# Altium PCB RFID_Tag.PcbDoc
Units mm, origin at the board's own origin, x right, y up, seen from the top; angles counter-clockwise.
Board outline 31.5 x 19 mm, 2 copper layers (Top Layer, Bottom Layer); 28 components, 31 nets, 105 pads, 59 vias.
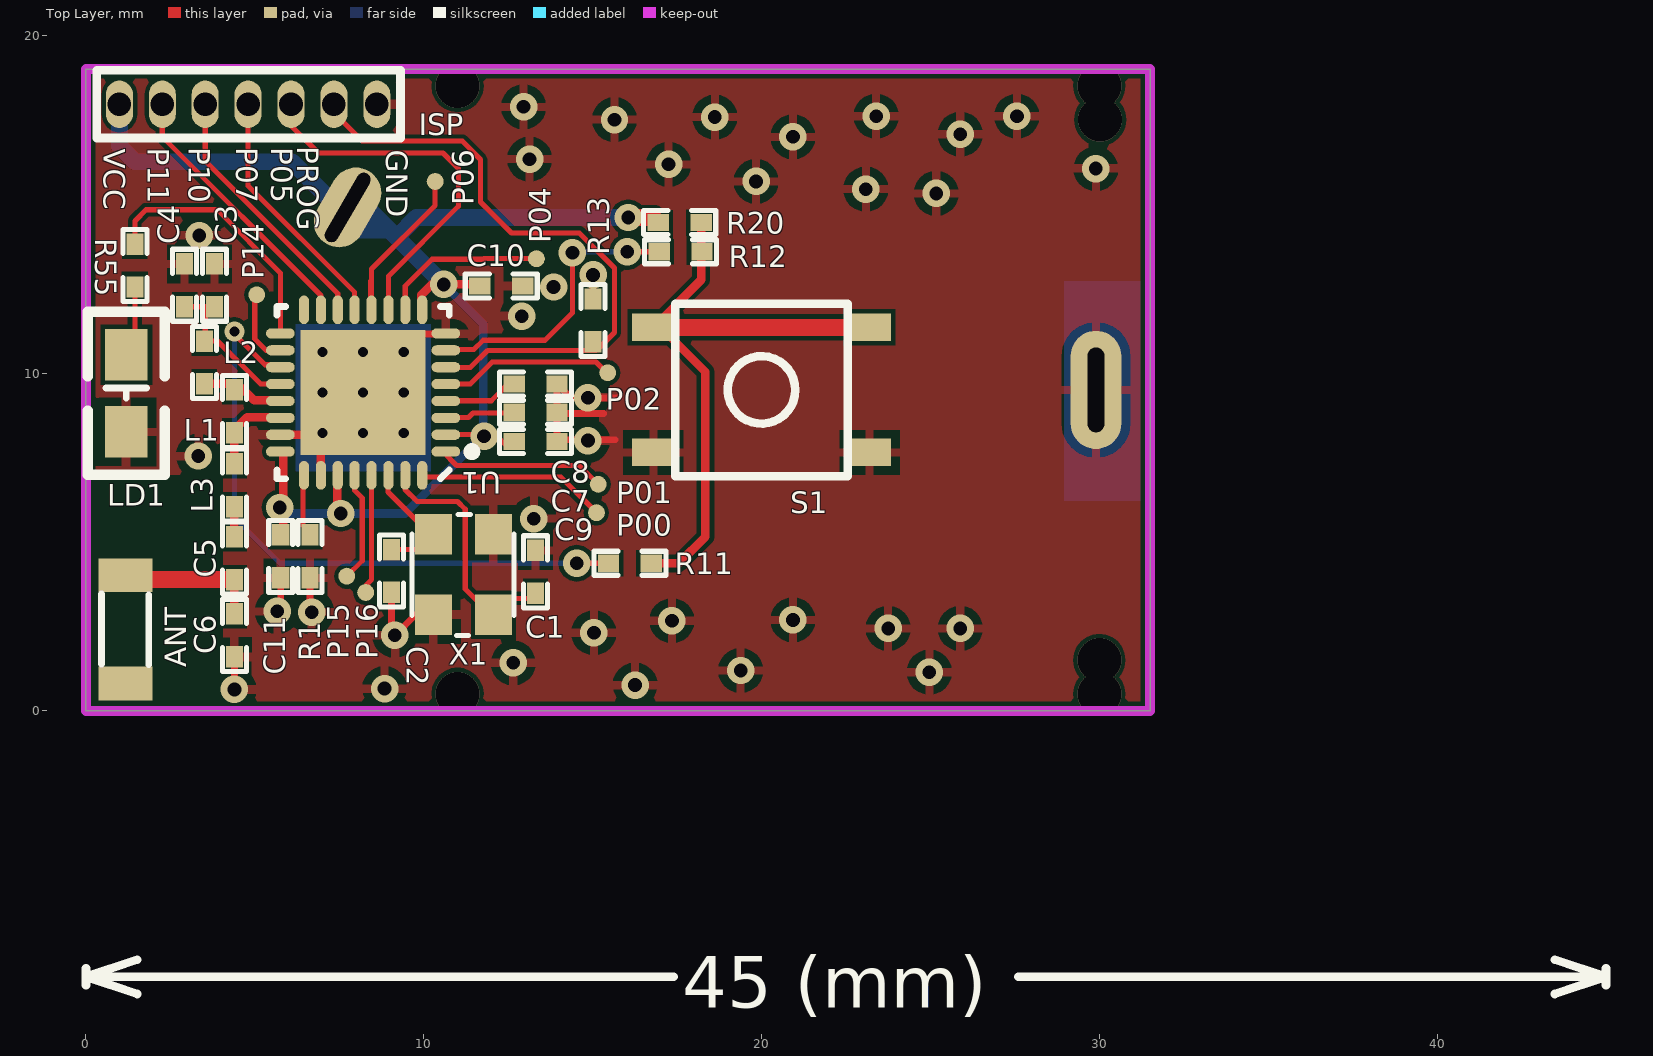
[diagram p0: Top Layer view]
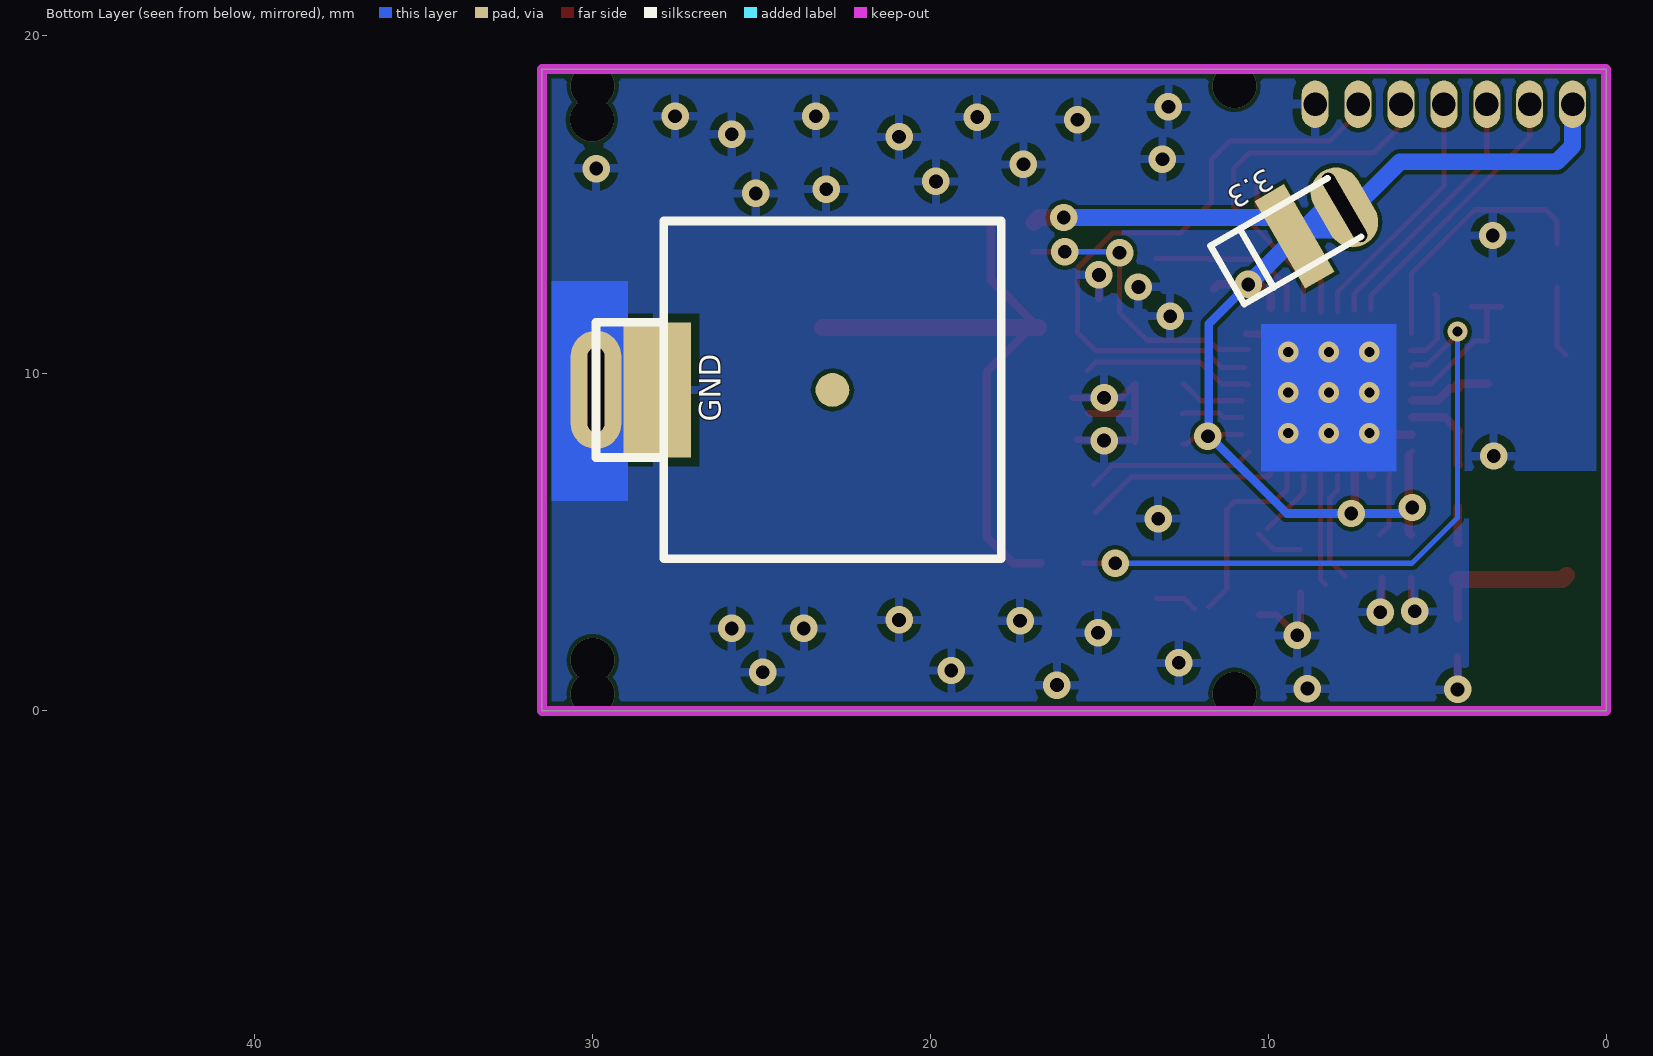
[diagram p1: Bottom Layer view, seen from below]

## Layer stack, top to bottom
Top Layer: signal copper 0.0356
Dielectric: dielectric 0.32, FR-4, Dk 4.8
Bottom Layer: signal copper 0.0356

## Board outline
0,0 0,19 31.5,19 31.5,0

## Design rules (kind name [scope] priority, off if disabled: settings)
Clearance [All] p1: gap=0.127
PolygonConnect [All] p1: connectstyle=Relief reliefconductorwidth=0.254 reliefentries=4 polygonreliefangle="90 Angle" airgapwidth=0.254
RoutingVias [All] p1: holewidth=0.711 width=1.27 viastyle="Through Hole" minholewidth=0.711 minwidth=1.27 maxholewidth=0.711 maxwidth=1.27
SolderMaskExpansion [All] p1: expansion=0.102
Width [All] p1: maxlimit=2 minlimit=0.1 preferedwidth=0.5 toplayer_prefwidth=0.3 minimp=50.000000 maximp=50.000000 favimp=50.000000
28 further rules are at their usual default settings.

## Components (designator, comment, footprint, x,y, rotation, side; value= is the part's Value field where it differs from the comment)
3.3 "Plug" CR2032电池座（正极） 7.746,14.902 r150 bottom
ANT "Antenna" 2.4G贴片天线 1.168,4.013 r270 top
C1 "NP0 50V" 0402s 13.31,4.115 r0 top
C2 "NP0 50V" 0402s 9.042,4.14 r180 top
C3 "X7R 16V" 0402s 3.81,12.598 r0 top
C4 "NP0 50V" 0402s 2.921,12.598 r0 top
C5 "NP0 +/-0.1pF, 50V" 0402s 4.394,4.521 r180 top
C6 "NP0 +/-0.1pF, 50V" 0402s 4.394,2.235 r0 top
C7 "X7R 16V" 0402s 13.31,8.839 r270 top
C8 "X7R 16V" 0402s 13.31,9.677 r270 top
C9 "X7R 16V" 0402s 13.31,7.976 r270 top
C10 "X7R 16V" 0402s 12.294,12.573 r270 top
C11 "X7R 16V" 0402s 5.766,4.572 r0 top
GND "Plug" CR2032电池座（负极） 22.9,9.5 r0 bottom locked
ISP "Header 7" SIP7-127 8.611,17.958 r90 top
L1 "Murata LQP15MN6N8B02D" 0402s 4.394,8.865 r0 top
L2 "Murata LQP15MN6N8B02D" 0402s 3.505,10.312 r0 top
L3 "Murata LQP15MN4N7B02D" 0402s 4.394,6.68 r0 top
LD1 "Header 2" DYS0805LED 1.194,8.255 r90 top
R1 "1%" 0402s 6.629,4.572 r0 top
R11 "NC(0R)" 0402s 16.104,4.369 r270 top
R12 "NC(0R)" 0402s 17.602,13.589 r270 top
R13 "" 0402s 15.011,11.557 r0 top
R20 "NC(100K)" 0402s 17.577,14.453 r270 top
R55 "1K" 0402s 1.448,13.183 r180 top
S1 "SW-PB" 4x4x1.5贴片 20,9.5 r0 top locked
U1 "QFN32 5x5 package" Nordic_QFN50P500X500X90-33N 8.204,9.423 r180 top
X1 "TSX-3225, 16MHz, Cl=9pF, +/-10ppm" "bt-xtal 3225" 11.684,2.845 r90 top

## Footprints (in the part's own frame and the unit in brackets; to place one, negate y for a bottom-side part, rotate by r counter-clockwise, add the part's x,y. Pads: shape width x height; smd on the part's side, far side on the other; paste and mask are expansions set on the pad)
2.4G贴片天线 [mm]
  rect 1x1.6 smd: 1(0,0) 2(3.2,0)
  silkscreen extent 0.56,-0.71 2.65,0.69
4x4x1.5贴片 [mm]
  rect 1.27x0.813 smd: 1(-3.2,1.85) 1(3.2,1.85) 2(-3.2,-1.85) 2(3.2,-1.85)
  silkscreen extent -2.55,-2.55 2.55,2.55
0402s [mil]
  rect 20x25 smd: 1(0,25) 2(0,-25)
  silkscreen extent -14,-42 14,42
"bt-xtal 3225" [mm] "Mercury X32 series"
  rect 1.2x1.1 smd: 1(0,-0.381) 2(2.388,-0.381) 3(2.388,1.397) 4(0,1.4)
  silkscreen extent -0.61,-0.99 2.97,2.03
CR2032电池座（正极） [mm]
  oval 1.5x2.5 hole 0.4 slot 2.3 at 90 deg: 1(0,0)
  silkscreen extent -4,-1 0,1
CR2032电池座（负极） [mm]
  round 1 smd: 0(0,0)
  oval 1.5x3.5 hole 0.5 slot 2.5 at 90 deg: 1(7,0)
  silkscreen extent -5,-5 7,5
DYS0805LED [mil]
  rect 60x50 smd: 1(0,0) 2(90,0)
  silkscreen extent -50,-45 140,45
Nordic_QFN50P500X500X90-33N [mm] "QFN32 5x5x0.85mm, 0.5mm pitch - Medium Density"
  oval 0.85x0.3 smd mask+0.076: 1(-2.45,1.75) 2(-2.45,1.25) 3(-2.45,0.75) 4(-2.45,0.25) 5(-2.45,-0.25) 6(-2.45,-0.75) 7(-2.45,-1.25) 8(-2.45,-1.75) 17(2.45,-1.75) 18(2.45,-1.25) 19(2.45,-0.75) 20(2.45,-0.25) 21(2.45,0.25) 22(2.45,0.75) 23(2.45,1.25) 24(2.45,1.75)
  oval 0.3x0.85 smd mask+0.076: 9(-1.75,-2.45) 10(-1.25,-2.45) 11(-0.75,-2.45) 12(-0.25,-2.45) 13(0.25,-2.45) 14(0.75,-2.45) 15(1.25,-2.45) 16(1.75,-2.45) 25(1.75,2.45) 26(1.25,2.45) 27(0.75,2.45) 28(0.25,2.45) 29(-0.25,2.45) 30(-0.75,2.45) 31(-1.25,2.45) 32(-1.75,2.45)
  rect 3.7x3.7 smd mask+0: 33(0,0)
  silkscreen extent -3.35,-2.55 2.55,2.55
SIP7-127 [mm]
  oval 1.4x0.8 hole 0.7: 1(0,0) 2(0,1.27) 3(0,2.54) 4(0,3.81) 5(0,5.08) 6(0,6.35) 7(0,7.62)
  silkscreen extent -1,-0.7 1,8.29

## Part data
ANT: "Generic Antenna"
C1 C2 C3 C4 C5 C6 C7 C8 C9 C10 C11: library part Cap, "Capacitor"
ISP: "Header, 7-Pin"
L1 L2 L3: library part Inductor, "Inductor"
LD1: "Header, 2-Pin"
R1 R13: library part Res2, "Resistor"
R11 R12 R20 R55: library part RES2
S1: "Switch"
U1: library part "nRF24LE1 - 5x5", "2.4GHz Tranceiver with embedded MCU and 10 bit ADC"
X1: library part BT-XTAL, "Crystal"

## Free pads (board coordinates)
  round 0.5 smd: 0(7.722,3.988) 1(8.28,3.505) 2(10.338,15.672) 3(15.443,10.008) 4(15.113,5.867) 5(15.164,6.706) 6(13.335,13.386) 7(5.055,12.319)
  rect 1x3 smd far side rot 150: 0(9.22,14.046)
  rect 2x4 smd far side: 1(28.092,9.5)

## Via types
v1: diameter 0.813, hole 0.406, Top Layer to Bottom Layer, tented both sides, 43 vias
v2: diameter 0.61, hole 0.305, Top Layer to Bottom Layer, tented both sides, 9 vias
v3: diameter 1.3, hole 1.3, Top Layer to Bottom Layer, 6 vias
v4: diameter 0.6, hole 0.3, Top Layer to Bottom Layer, tented both sides, 1 vias

## Nets (pads, with @x,y where several pads share a name; then routed paths per layer and width w, separated by ;. In a path a pad name is that pad's centre, name@x,y a point inside that pad or via, vN(x,y) a via of type N, cw(c..) or ccw(c..) an arc to the next point about the centre after c; other vN are vias at no path point)
GND: C1.1 C2.1 C3.1 C4.1 C6.2 C7.1 C8.1 C9.1 C10.1 C11.2 GND.1 ISP.1 LD1.1 pad.1@28.092,9.5 R1.2 R13.1 S1.2 U1.8 U1.23 U1.26 U1.33 X1.2 X1.4 | length 15.5
  Top Layer w0.2: v1(4.394,0.635) C6.2 ; v1(5.664,2.946) 5.766,3.048 C11.2 ; R1.2 6.629,2.972 v1(6.68,2.921) ; C2.1 9.042,2.337 v1(9.144,2.235) 9.754,2.845 X1.4 ; U1.33@9.825,11.044 9.939,11.158 10.639,11.158 U1.8 ; R13.1 v1(15.011,12.903) ; 15.33,8.8 13.984,8.8 C7.1 ; 15.672,8.026 13.995,8.026 C9.1 C7.1 ; 15.799,9.271 v1(14.859,9.271) 14.351,9.271 C8.1 C7.1
  Top Layer w0.254: U1.23 U1.33@6.477,8.173 ; U1.26 U1.33@6.954,7.583
  other v1: 8.839,0.66 16.256,0.762 24.968,1.143 19.38,1.194 12.649,1.422 15.037,2.311 23.749,2.438 25.883,2.438 17.348,2.667 20.93,2.692 13.259,5.69 3.327,7.544 14.859,8.001 12.903,11.684 13.843,12.548 3.353,14.072 25.171,15.316 23.089,15.443 19.837,15.672 29.896,16.053 17.247,16.18 13.132,16.332 20.93,16.993 25.883,17.069 15.646,17.501 18.618,17.577 23.393,17.602 27.559,17.602 12.954,17.882
NetANT_1: ANT.1 C5.1 C6.1 | length 4.2
  Top Layer w0.254: C6.1@4.394,2.743 C6.1 C5.1@4.394,3.658
  Top Layer w0.5: ANT.1 1.295,3.886 C5.1
NetC1_2: C1.2 U1.31 X1.1 | length 6.9
  Top Layer w0.152: U1.31@9.449,7.036 9.449,6.553 9.804,6.198 10.998,6.198 11.227,5.969 11.227,3.607 X1.1@11.76,3.073 ; X1.1@12.192,3.023 12.497,3.327 C1.2@13.31,3.327
NetC2_2: C2.2 U1.30 X1.3 | length 3.5
  Top Layer w0.152: U1.30@8.941,6.985 8.941,6.477 9.461,5.956 ; C2.2 9.829,4.775 X1.3 ; 9.474,5.944 X1.3@10.033,5.385
NetC3_2: C3.2 C4.2 L2.1 U1.20 | length 4.7
  Top Layer w0.152: C4.2@3.099,11.963 3.962,11.963 C3.2@3.988,11.989 ; L2.1 3.898,10.947 5.172,9.673 U1.20 ; L2.1@3.531,10.973 3.531,11.963 ; U1.20@5.736,9.677 U1.20@5.766,9.677
NetC5_2: C5.2 L3.2 | length 1.1
  Top Layer w0.254: C5.2@4.369,4.978 4.394,5.004 L3.2
NetC7_2: C7.2 U1.3 | length 1.8
  Top Layer w0.152: U1.3@10.782,8.681 11.323,8.681 11.46,8.819 12.509,8.819 C7.2@12.539,8.788
NetC8_2: C8.2 U1.4 | length 2
  Top Layer w0.152: U1.4@10.782,9.181 12.001,9.181 12.497,9.677 C8.2@12.539,9.677
NetL1_1: L1.1 L2.2 U1.21 | length 2.5
  Top Layer w0.254: L2.2 4.394,9.677 L1.1@4.42,9.652 ; L1.1@4.36,9.55 4.623,9.55 4.984,9.189 U1.21@5.736,9.189
NetL1_2: L1.2 L3.1 U1.22 | length 2.5
  Top Layer w0.254: L1.2@4.36,8.28 4.769,8.689 U1.22@5.736,8.689 ; L3.1@4.369,7.29 L3.1 L1.2@4.394,8.28
NetLD1_2: LD1.2 R55.1 | length 2.1
  Top Layer w0.152: LD1.2 1.448,10.795 R55.1
NetR1_1: R1.1 U1.25 | length 1.9
  Top Layer w0.152: U1.25@6.401,7.01 6.426,6.985 6.426,5.74 6.426,5.486 R1.1@6.706,5.207
NetR11_1: R11.1 R12.1 R20.1 S1.1 | length 18.8
  Top Layer w0.254: R11.1 17.551,4.369 18.339,5.156 18.339,10.033 S1.1@17.022,11.35 ; S1.1@16.8,11.35 18.212,12.762 R20.1
  Top Layer w0.5: S1.1@16.8,11.35 17.022,11.35 S1.1@23.2,11.35
P0.0: pad.4 U1.32 | length 5.8
  Top Layer w0.152: U1.32@9.931,7.061 U1.32@10.033,6.96 ; U1.32 10.006,6.922 14.058,6.922 pad.4
P0.1: pad.5 U1.1 | length 5
  Top Layer w0.152: U1.1@10.566,7.671 10.973,7.264 14.605,7.264 pad.5
P0.2: pad.3 U1.5 | length 5.2
  Top Layer w0.152: U1.5@10.592,9.652 U1.5@10.654,9.652 ; U1.5 11.377,9.673 12.029,10.326 15.1,10.326 pad.3@15.367,10.058
P0.3: R12.2 U1.7 | length 8.6
  Top Layer w0.152: U1.7@10.592,10.693 11.481,10.693 11.76,10.973 13.589,10.973 14.402,11.786 v1(14.402,13.564) ; v1(16.027,13.589) R12.2
  Bottom Layer w0.152: v1(14.402,13.564) 14.427,13.589 v1(16.027,13.589)
P0.4: pad.6 U1.10 | length 4.9
  Top Layer w0.152: U1.10@9.449,11.862 U1.10@9.449,11.873 ; U1.10 9.454,12.578 10.246,13.37 11.766,13.37 11.782,13.386 pad.6
P0.5: ISP.3 U1.11 | length 11.2
  Top Layer w0.152: ISP.3 6.071,17.323 6.883,16.51 10.566,16.51 11.024,16.053 11.024,14.935 8.954,12.866 U1.11
P0.6: pad.2 U1.12 | length 5.5
  Top Layer w0.152: U1.12@8.433,11.811 8.433,12.725 ; U1.12 8.454,13.077 10.338,14.961 pad.2
P0.7: ISP.4 U1.13 | length 7.5
  Top Layer w0.152: ISP.4 4.801,15.545 7.954,12.391 U1.13 ; U1.13@7.95,11.811 U1.13@7.95,11.873
P1.0: ISP.5 U1.14 | length 7.7
  Top Layer w0.152: ISP.5 3.531,16.281 7.454,12.358 U1.14 ; U1.14@7.442,11.862 U1.14@7.442,11.873
P1.1: ISP.6 U1.15 | length 8
  Top Layer w0.152: ISP.6 2.261,16.993 6.96,12.294 U1.15@6.96,11.862
P1.2: U1.16
P1.3: R55.2 U1.17 | length 7.7
  Top Layer w0.152: R55.2 1.448,14.503 1.778,14.834 3.885,14.834 5.754,12.964 U1.17
P1.4: pad.7 U1.18 | length 2.5
  Top Layer w0.152: pad.7 4.996,12.26 4.996,11.006 5.329,10.673 U1.18 ; U1.18@5.481,10.668 U1.18@5.791,10.668
P1.5: pad.0@7.722,3.988 U1.28 | length 3.3
  Top Layer w0.152: pad.0@7.722,3.988 8.179,4.445 8.179,6.299 7.954,6.524 U1.28
P1.6: pad.1@8.28,3.505 U1.29 | length 3.3
  Top Layer w0.152: pad.1@8.306,3.734 8.458,3.886 U1.29@8.458,7.01
PROG: ISP.2 R13.2 U1.6 | length 18.5
  Top Layer w0.152: ISP.2 7.341,17.704 8.179,16.866 11.141,16.866 11.681,16.326 11.681,15.065 12.598,14.148 14.605,14.148 15.646,13.106 15.646,11.201 15.113,10.668 11.887,10.668 11.379,10.16 U1.6@10.693,10.16
REST: R11.2 U1.19 | length 18.9
  Top Layer w0.152: v4@4.422,11.128 5.303,10.247 5.68,10.247 U1.19 ; v1(14.529,4.369) R11.2
  Bottom Layer w0.152: v4(4.394,11.227) 4.394,5.715 5.74,4.369 v1(14.529,4.369) ; v1@14.529,4.42 v1@14.554,4.42
VCC_NRF: 3.3.1 C9.2 C10.2 C11.1 ISP.7 pad.0@9.22,14.046 R20.2 U1.2 U1.9 U1.24 U1.27 | length 41.8
  Top Layer w0.152: U1.24@5.736,7.689 U1.24@5.842,7.584 ; v1@7.442,5.944 v1(7.544,5.842) ; U1.2@10.782,8.181 12.113,8.181 12.395,7.899 C9.2@12.539,7.899
  Top Layer w0.254: C11.1 5.842,5.283 U1.24@5.842,7.584 ; v1@7.442,5.944 U1.27@7.442,7.087 ; U1.9@9.931,11.938 9.931,12.319 10.236,12.624 v1(10.592,12.624) 11.481,12.624 C10.2@11.608,12.497
  Top Layer w0.5: v1(16.053,14.605) 16.789,14.605 R20.2
  Bottom Layer w0.254: v1@5.715,6.045 5.918,5.842 v1(7.544,5.842) 9.449,5.842 11.76,8.153 11.76,11.455 v1(10.592,12.624)
  Bottom Layer w0.5: ISP.7 0.991,16.713 1.448,16.256 6.096,16.256 8.115,14.237 pad.0@8.979,14.237 ; 3.3.1@8,14.8 8.416,14.8 pad.0@8.979,14.237 ; pad.0@9.22,14.046 9.779,14.605 v1(16.053,14.605) ; v1(10.592,12.624) pad.0@8.979,14.237
  other v1: 5.74,6.02 11.786,8.128
pads on no net: ANT.2 GND.0
copper on no net:
  other v2: 7.004,8.223 8.204,8.223 9.404,8.223 7.004,9.423 8.204,9.423 9.404,9.423 7.004,10.623 8.204,10.623 9.404,10.623
  other v3: 11,0.5 30,0.5 30,1.5 30.023,17.5 11,18.5 30,18.5

## Polygon pours and split planes (outlines as drawn)
GND on Bottom Layer "Top Overlay-No Net" (solid, remove dead copper, pour order 2): 31.5,0 31.5,18.898 0.102,18.898 0,19 0,7.112 4.064,7.112 4.064,0 31.5,0
GND on Top Layer "Top Overlay-No Net" (solid, remove dead copper, pour order 4): 31.5,0 31.5,19 0,19 0,6.985 4.039,6.985 4.064,6.96 4.064,0 31.5,0

## Keep-outs
Keep-Out Layer:
  the board outline again, w0.3

## Other copper
Bottom Layer:
  rectangle net GND: 6.198,7.087 10.211,11.455
  rectangle net GND: 28.956,6.209 31.218,12.725

## Silkscreen, mask and mechanical layers (free items; w line width, h text height)
Top Overlay:
  lines w0.254: 0,-8.128 0,-7.62 ; 1.524,-8.382 0,-7.874 ; 1.524,-7.366 0,-7.874 ; 17.396,-7.874 0,-7.874 ; 27.604,-7.874 45,-7.874 ; 43.476,-8.382 45,-7.874 ; 43.476,-7.366 45,-7.874 ; 45,-8.128 45,-7.62
  text "PROG" at 6.248,16.713 h0.64 r270
  text "P10" at 3.048,16.688 h0.64 r270
  text "P07" at 4.445,16.688 h0.64 r270
  text "P05" at 5.486,16.688 h0.64 r270
  text "P11" at 1.829,16.662 h0.64 r270
  text "VCC" at 0.533,16.637 h0.64 r270
  text "GND" at 8.89,16.612 h0.64 r270
  text "P06" at 11.481,14.961 h0.64 r90
  text "P04" at 13.767,13.843 h0.64 r90
  text "P14" at 5.258,12.776 h0.64 r90
  text "P02" at 15.392,8.915 h0.64
  text "P01" at 15.697,6.147 h0.64
  text "P00" at 15.697,5.182 h0.64
  text "P15" at 7.772,1.524 h0.64 r90
  text "P16" at 8.636,1.524 h0.64 r90
  text "45 (mm)" at 17.65,-8.788 h1.52